# Altium PCB PCB4.PcbDoc
Units mm, origin at the board's own origin, x right, y up, seen from the top; angles counter-clockwise.
Board outline 43.43 x 53.59 mm, 2 copper layers (Top Layer, Bottom Layer); 15 components, 25 nets, 64 pads, 1 vias.
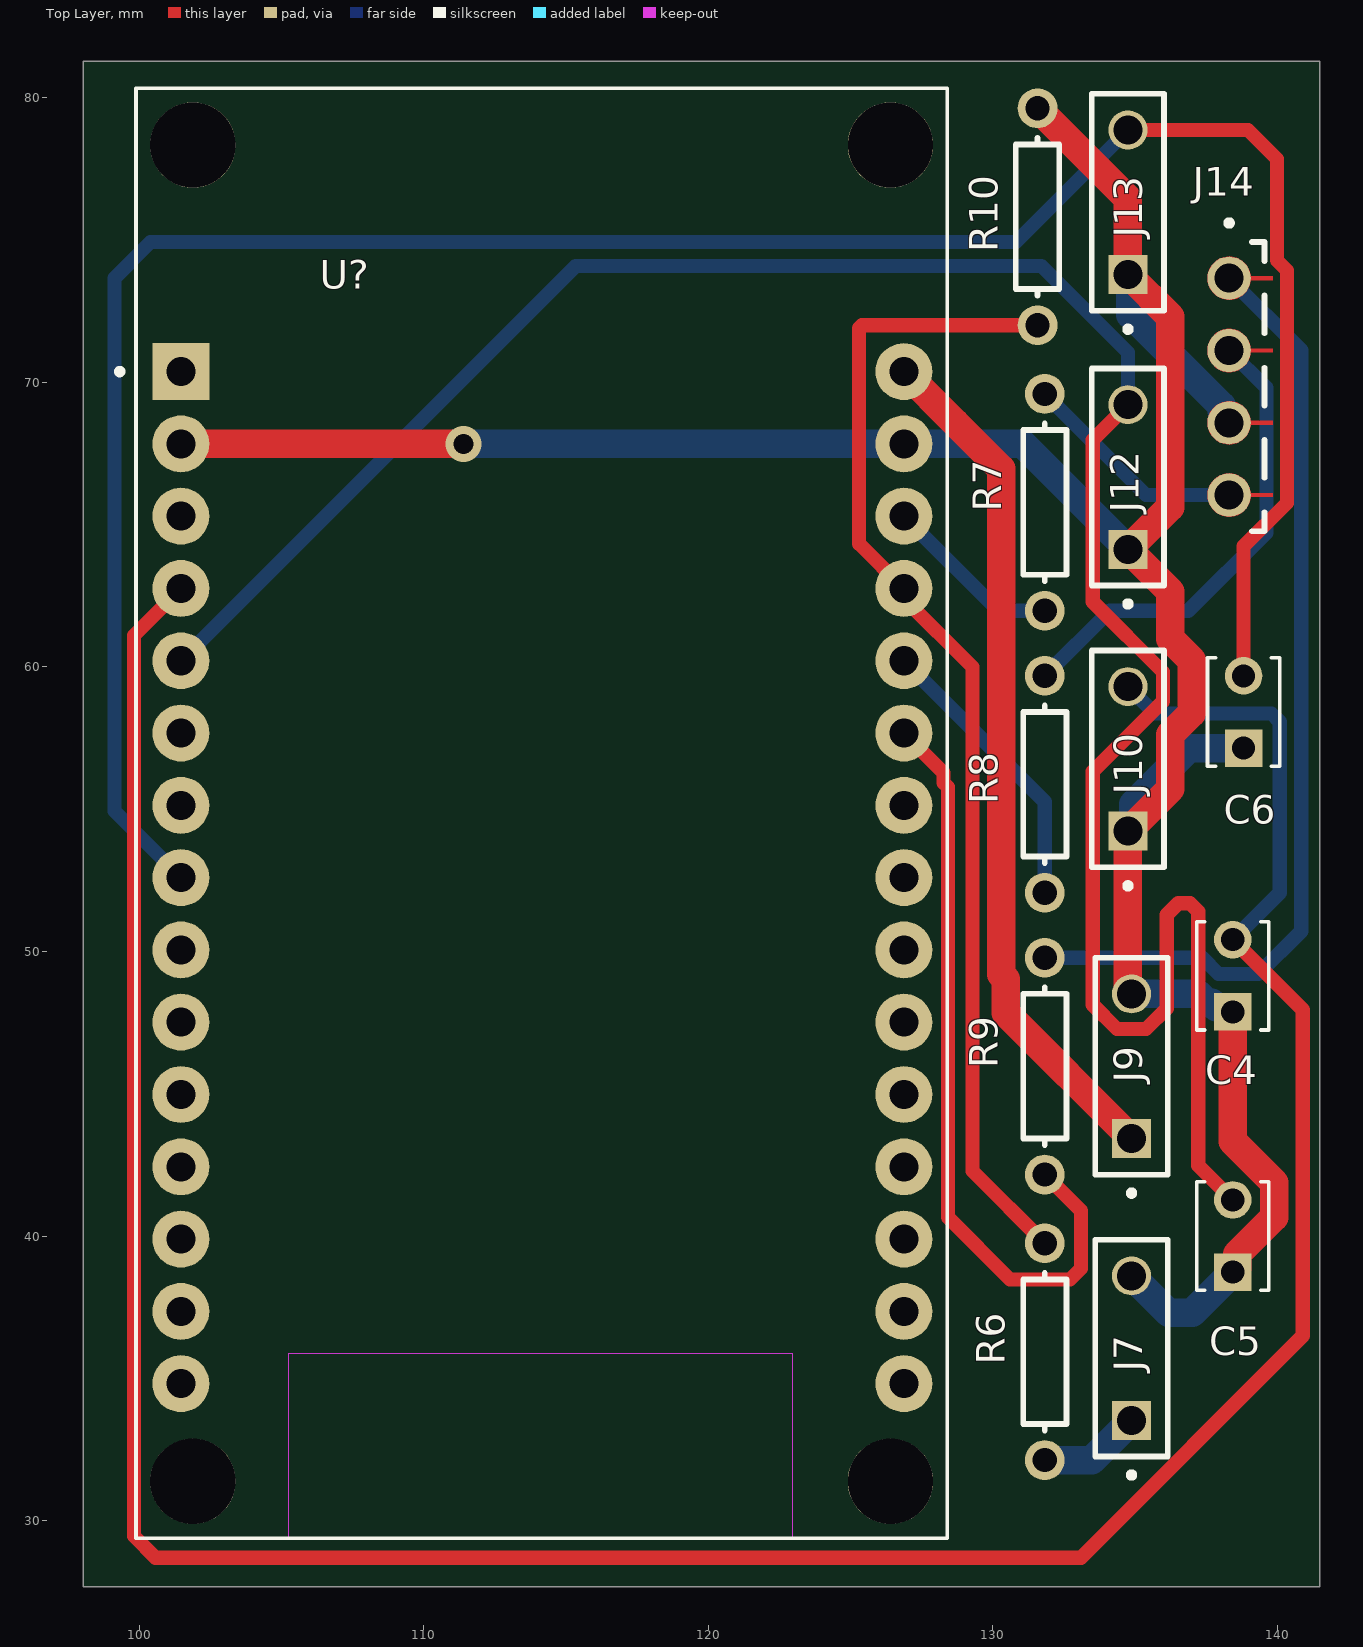
[diagram p0: Top Layer view]
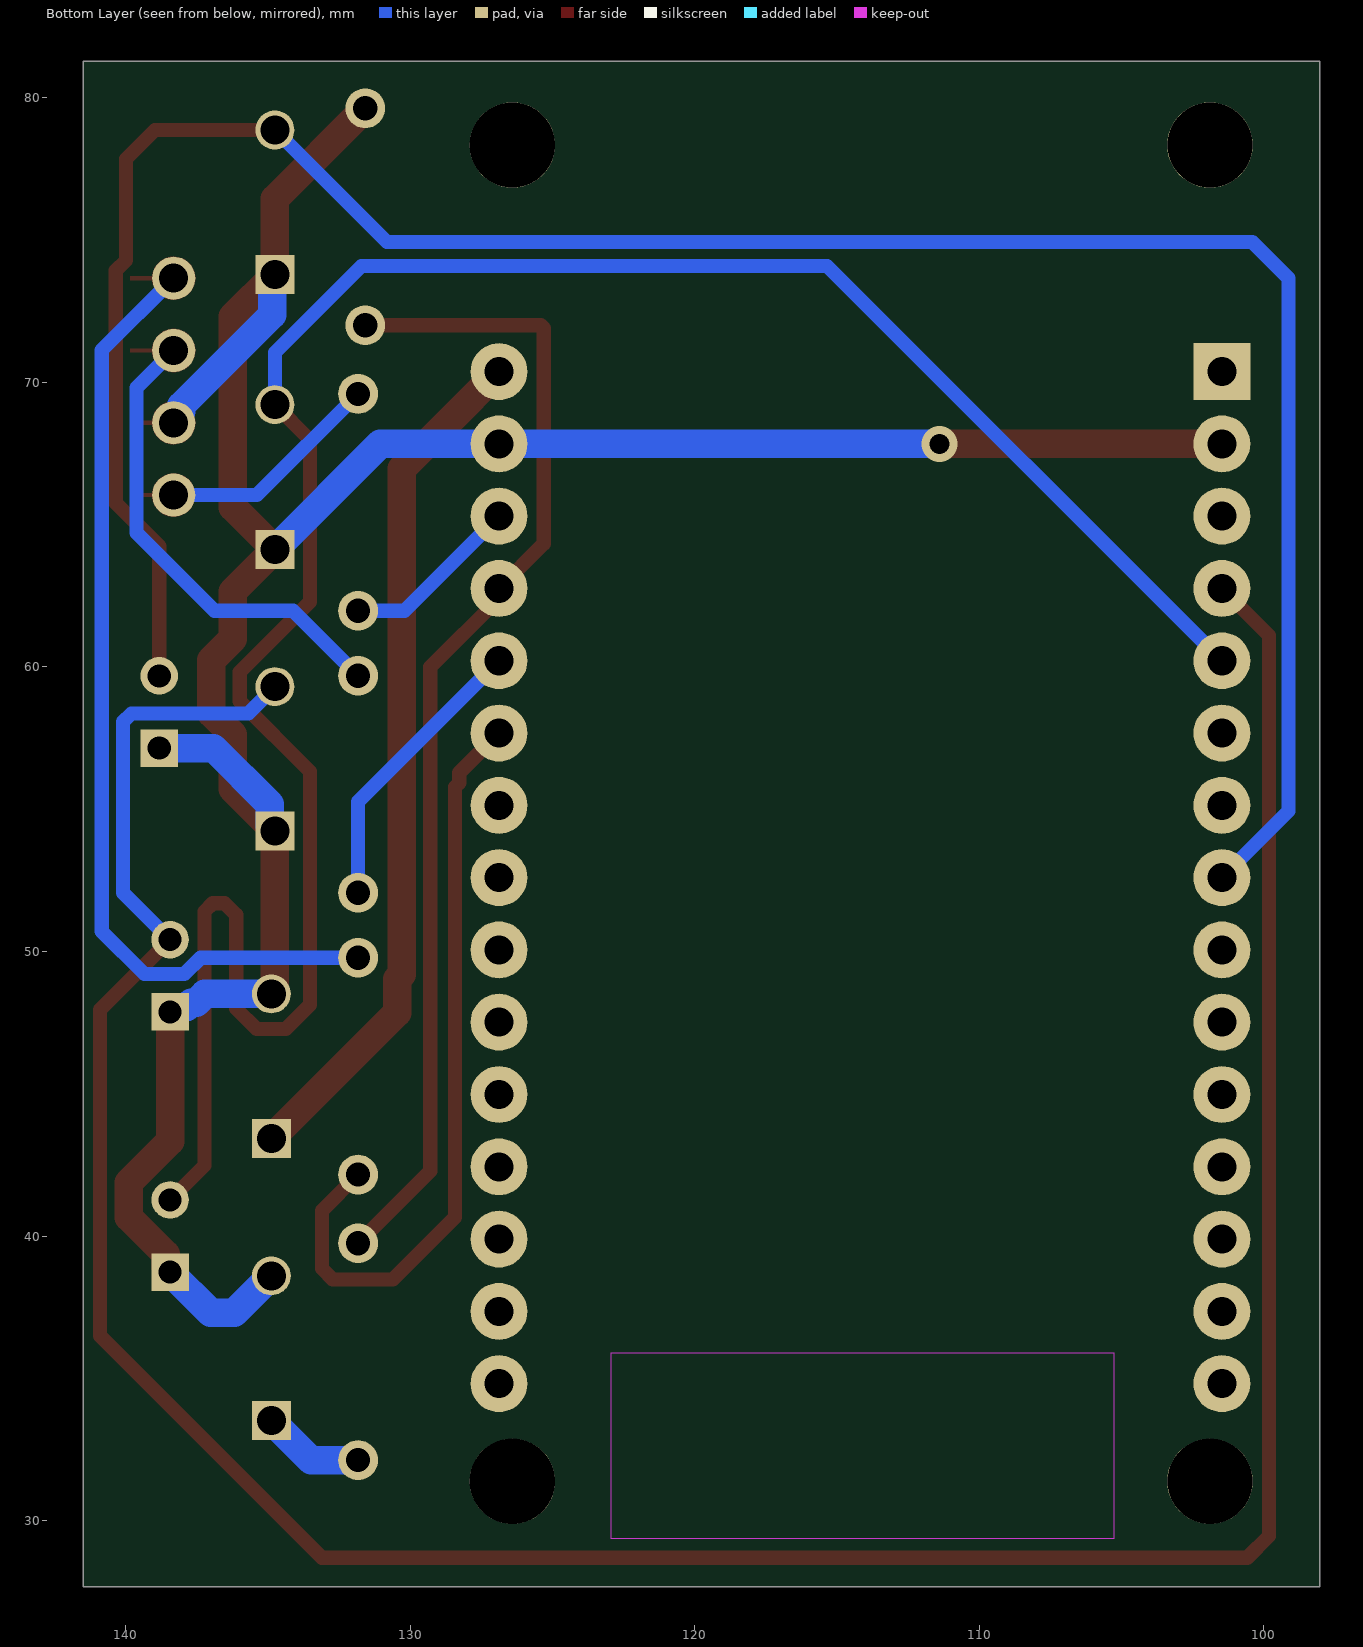
[diagram p1: Bottom Layer view, seen from below]

## Layer stack, top to bottom
Top Solder: solder mask 0.0102, Solder Resist, Dk 3.5
Top Layer: signal copper 0.0356
Dielectric 1: dielectric 0.32, FR-4, Dk 4.8
Bottom Layer: signal copper 0.0356
Bottom Solder: solder mask 0.0102, Solder Resist, Dk 3.5

## Board outline
98.044,27.686 141.478,27.686 141.478,81.28 98.044,81.28

## Design rules (kind name [scope] priority, off if disabled: settings)
Clearance [All] p1: gap=0.254 ignorepadtopadclearanceinfootprint=FALSE except(0.3: Arc-THPad Arc-Hole Track-THPad Track-Hole SMDPad-Hole THPad-Hole Via-Hole Fill-Hole Poly-Hole Region-Hole Text-Hole)
HoleToHoleClearance [All] p1: gap=0.5 allowstackedmicrovias=TRUE
PolygonConnect [All] p1: connectstyle=Relief reliefconductorwidth=0.254 reliefentries=4 polygonreliefangle="90 Angle" airgapwidth=0.254
RoutingVias [All] p1: holewidth=0.711 width=1.27 viastyle="Through Hole" minholewidth=0.711 minwidth=1.27 maxholewidth=0.711 maxwidth=1.27
SolderMaskExpansion [All] p1: expansion=0.102 istentingtop=FALSE
Width [All] p1: maxlimit=1 minlimit=0.3 preferedwidth=0.5
29 further rules are at their usual default settings.

## Components (designator, comment, footprint, x,y, rotation, side; value= is the part's Value field where it differs from the comment)
C4 "C315C470J1G5TA" CAPRR254W54L381T254H466 138.43,49.149 r90 top
C5 "C315C470J1G5TA" CAPRR254W54L381T254H466 138.43,40.005 r90 top
C6 "C315C470J1G5TA" CAPRR254W54L381T254H466 138.811,58.42 r90 top
J7 "S1" SAMTEC_TSW-202-07-T-S 134.874,33.528 r90 top
J9 "S4" SAMTEC_TSW-202-07-T-S 134.874,43.434 r90 top
J10 "S1" SAMTEC_TSW-202-07-T-S 134.747,54.229 r90 top
J12 "S2" SAMTEC_TSW-202-07-T-S 134.747,64.135 r90 top
J13 "S3" SAMTEC_TSW-202-07-T-S 134.747,73.787 r90 top
J14 "RGB" SAMTEC_MTLW-104-X-X-S-X 138.303,69.85 r90 top
R6 "Res1" AXIAL-0.3 131.826,35.941 r90 top value=30K
R7 "Res1" AXIAL-0.3 131.826,65.786 r90 top value=50
R8 "Res1" AXIAL-0.3 131.826,55.88 r90 top value=22
R9 "Res1" AXIAL-0.3 131.826,45.974 r90 top value=22
R10 "Res1" AXIAL-0.3 131.572,75.819 r90 top value=100K
U? "ESP32-DEVKIT-V1" MODULE_ESP32_DEVKIT_V1 114.173,54.864 r0 top

## Footprints (in the part's own frame and the unit in brackets; to place one, negate y for a bottom-side part, rotate by r counter-clockwise, add the part's x,y. Pads: shape width x height; smd on the part's side, far side on the other; paste and mask are expansions set on the pad)
AXIAL-0.3 [mm] "Axial Device, Thru-Hole; 2 Leads; 0.3 in Pin Spacing"
  round 1.4 hole 0.85: 1(-3.81,0) 2(3.81,0)
  silkscreen extent -2.77,-0.76 2.77,0.76
CAPRR254W54L381T254H466 [mm]
  rect 1.318x1.318 / inner round 1.318 / far side rect 1.318x1.318 hole 0.81: 1(-1.27,0)
  round 1.318 hole 0.81: 2(1.27,0)
  silkscreen extent -1.91,-1.27 1.91,1.27
MODULE_ESP32_DEVKIT_V1 [mm]
  rect 2x2 / inner round 2 / far side rect 2x2 hole 1.02: 1(-12.7,15.515)
  round 2 hole 1.02: 2(-12.7,12.975) 3(-12.7,10.435) 4(-12.7,7.895) 5(-12.7,5.355) 6(-12.7,2.815) 7(-12.7,0.275) 8(-12.7,-2.265) 9(-12.7,-4.805) 10(-12.7,-7.345) 11(-12.7,-9.885) 12(-12.7,-12.425) 13(-12.7,-14.965) 14(-12.7,-17.505) 15(-12.7,-20.045) 16(12.7,-20.045) 17(12.7,-17.505) 18(12.7,-14.965) 19(12.7,-12.425) 20(12.7,-9.885) 21(12.7,-7.345) 22(12.7,-4.805) 23(12.7,-2.265) 24(12.7,0.275) 25(12.7,2.815) 26(12.7,5.355) 27(12.7,7.895) 28(12.7,10.435) 29(12.7,12.975) 30(12.7,15.515)
  round 3 hole 3 unplated: ""(-12.28,-23.475) ""(-12.28,23.475) ""(12.23,-23.475) ""(12.23,23.475)
  Keep-Out Layer region: 8.78,-25.475 -8.91,-25.475 -8.91,-18.985 8.78,-18.985
  Keep-Out Layer region: 8.78,-25.475 -8.91,-25.475 -8.91,-18.985 8.78,-18.985
  silkscreen extent -14.95,-25.47 14.23,25.47
SAMTEC_MTLW-104-X-X-S-X [mm]
  round 1.52 hole 1.02: 01(3.81,0) 02(1.27,0) 03(-1.27,0) 04(-3.81,0)
  Top Layer region: -3.731,0.756 -3.652,0.743 -3.575,0.723 -3.501,0.694 -3.43,0.658 -3.363,0.615 -3.301,0.565 -3.245,0.509 -3.195,0.447 -3.152,0.38 -3.116,0.309 -3.087,0.235 -3.067,0.158 -3.054,0.079 -3.05,0 -3.051,-0.038 -3.054,-0.076 -3.058,-0.113 -3.065,-0.151 -3.073,-0.187 -3.083,-0.224 -3.095,-0.259 -3.109,-0.294 -3.124,-0.329 -3.141,-0.363 -3.16,-0.395 -3.18,-0.427 -3.202,-0.458 -3.225,-0.487 -3.25,-0.516 -3.276,-0.543 -3.304,-0.569 -3.333,-0.593 -3.362,-0.616 -3.393,-0.638 -3.425,-0.658 -3.458,-0.676 -3.492,-0.692 -3.527,-0.707 -3.562,-0.721 -3.598,-0.732 -3.634,-0.742 -3.671,-0.75 -3.708,-0.756 -3.745,-0.76 -3.745,-1.53 -3.875,-1.53 -3.875,-0.76 -3.912,-0.756 -3.949,-0.75 -3.986,-0.742 -4.022,-0.732 -4.058,-0.721 -4.093,-0.707 -4.128,-0.692 -4.162,-0.676 -4.195,-0.658 -4.227,-0.638 -4.258,-0.616 -4.287,-0.593 -4.316,-0.569 -4.344,-0.543 -4.37,-0.516 -4.395,-0.487 -4.418,-0.458 -4.44,-0.427 -4.46,-0.395 -4.479,-0.363 -4.496,-0.329 -4.511,-0.294 -4.525,-0.259 -4.537,-0.224 -4.547,-0.187 -4.555,-0.151 -4.562,-0.113 -4.566,-0.076 -4.569,-0.038 -4.57,0 -4.566,0.079 -4.553,0.158 -4.533,0.235 -4.504,0.309 -4.468,0.38 -4.425,0.447 -4.375,0.509 -4.319,0.565 -4.257,0.615 -4.19,0.658 -4.119,0.694 -4.045,0.723 -3.968,0.743 -3.889,0.756 -3.81,0.76
  Top Layer region: -1.191,0.756 -1.112,0.743 -1.035,0.723 -0.961,0.694 -0.89,0.658 -0.823,0.615 -0.761,0.565 -0.705,0.509 -0.655,0.447 -0.612,0.38 -0.576,0.309 -0.547,0.235 -0.527,0.158 -0.514,0.079 -0.51,0 -0.511,-0.038 -0.514,-0.076 -0.518,-0.113 -0.525,-0.151 -0.533,-0.187 -0.543,-0.224 -0.555,-0.259 -0.569,-0.294 -0.584,-0.329 -0.601,-0.363 -0.62,-0.395 -0.64,-0.427 -0.662,-0.458 -0.685,-0.487 -0.71,-0.516 -0.736,-0.543 -0.764,-0.569 -0.793,-0.593 -0.822,-0.616 -0.853,-0.638 -0.885,-0.658 -0.918,-0.676 -0.952,-0.692 -0.987,-0.707 -1.022,-0.721 -1.058,-0.732 -1.094,-0.742 -1.131,-0.75 -1.168,-0.756 -1.205,-0.76 -1.205,-1.53 -1.335,-1.53 -1.335,-0.76 -1.372,-0.756 -1.409,-0.75 -1.446,-0.742 -1.482,-0.732 -1.518,-0.721 -1.553,-0.707 -1.588,-0.692 -1.622,-0.676 -1.655,-0.658 -1.687,-0.638 -1.718,-0.616 -1.747,-0.593 -1.776,-0.569 -1.804,-0.543 -1.83,-0.516 -1.855,-0.487 -1.878,-0.458 -1.9,-0.427 -1.92,-0.395 -1.939,-0.363 -1.956,-0.329 -1.971,-0.294 -1.985,-0.259 -1.997,-0.224 -2.007,-0.187 -2.015,-0.151 -2.022,-0.113 -2.026,-0.076 -2.029,-0.038 -2.03,0 -2.026,0.079 -2.013,0.158 -1.993,0.235 -1.964,0.309 -1.928,0.38 -1.885,0.447 -1.835,0.509 -1.779,0.565 -1.717,0.615 -1.65,0.658 -1.579,0.694 -1.505,0.723 -1.428,0.743 -1.349,0.756 -1.27,0.76
  Top Layer region: 1.349,0.756 1.428,0.743 1.505,0.723 1.579,0.694 1.65,0.658 1.717,0.615 1.779,0.565 1.835,0.509 1.885,0.447 1.928,0.38 1.964,0.309 1.993,0.235 2.013,0.158 2.026,0.079 2.03,0 2.029,-0.038 2.026,-0.076 2.022,-0.113 2.015,-0.151 2.007,-0.187 1.997,-0.224 1.985,-0.259 1.971,-0.294 1.956,-0.329 1.939,-0.363 1.92,-0.395 1.9,-0.427 1.878,-0.458 1.855,-0.487 1.83,-0.516 1.804,-0.543 1.776,-0.569 1.747,-0.593 1.718,-0.616 1.687,-0.638 1.655,-0.658 1.622,-0.676 1.588,-0.692 1.553,-0.707 1.518,-0.721 1.482,-0.732 1.446,-0.742 1.409,-0.75 1.372,-0.756 1.335,-0.76 1.335,-1.53 1.205,-1.53 1.205,-0.76 1.168,-0.756 1.131,-0.75 1.094,-0.742 1.058,-0.732 1.022,-0.721 0.987,-0.707 0.952,-0.692 0.918,-0.676 0.885,-0.658 0.853,-0.638 0.822,-0.616 0.793,-0.593 0.764,-0.569 0.736,-0.543 0.71,-0.516 0.685,-0.487 0.662,-0.458 0.64,-0.427 0.62,-0.395 0.601,-0.363 0.584,-0.329 0.569,-0.294 0.555,-0.259 0.543,-0.224 0.533,-0.187 0.525,-0.151 0.518,-0.113 0.514,-0.076 0.511,-0.038 0.51,0 0.514,0.079 0.527,0.158 0.547,0.235 0.576,0.309 0.612,0.38 0.655,0.447 0.705,0.509 0.761,0.565 0.823,0.615 0.89,0.658 0.961,0.694 1.035,0.723 1.112,0.743 1.191,0.756 1.27,0.76
  Top Layer region: 3.889,0.756 3.968,0.743 4.045,0.723 4.119,0.694 4.19,0.658 4.257,0.615 4.319,0.565 4.375,0.509 4.425,0.447 4.468,0.38 4.504,0.309 4.533,0.235 4.553,0.158 4.566,0.079 4.57,0 4.569,-0.038 4.566,-0.076 4.562,-0.113 4.555,-0.151 4.547,-0.187 4.537,-0.224 4.525,-0.259 4.511,-0.294 4.496,-0.329 4.479,-0.363 4.46,-0.395 4.44,-0.427 4.418,-0.458 4.395,-0.487 4.37,-0.516 4.344,-0.543 4.316,-0.569 4.287,-0.593 4.258,-0.616 4.227,-0.638 4.195,-0.658 4.162,-0.676 4.128,-0.692 4.093,-0.707 4.058,-0.721 4.022,-0.732 3.986,-0.742 3.949,-0.75 3.912,-0.756 3.875,-0.76 3.875,-1.53 3.745,-1.53 3.745,-0.76 3.708,-0.756 3.671,-0.75 3.634,-0.742 3.598,-0.732 3.562,-0.721 3.527,-0.707 3.492,-0.692 3.458,-0.676 3.425,-0.658 3.393,-0.638 3.362,-0.616 3.333,-0.593 3.304,-0.569 3.276,-0.543 3.25,-0.516 3.225,-0.487 3.202,-0.458 3.18,-0.427 3.16,-0.395 3.141,-0.363 3.124,-0.329 3.109,-0.294 3.095,-0.259 3.083,-0.224 3.073,-0.187 3.065,-0.151 3.058,-0.113 3.054,-0.076 3.051,-0.038 3.05,0 3.054,0.079 3.067,0.158 3.087,0.235 3.116,0.309 3.152,0.38 3.195,0.447 3.245,0.509 3.301,0.565 3.363,0.615 3.43,0.658 3.501,0.694 3.575,0.723 3.652,0.743 3.731,0.756 3.81,0.76
  silkscreen extent -5.08,-1.25 5.85,0.1
SAMTEC_TSW-202-07-T-S [mm]
  rect 1.37x1.37 hole 1.02: 01(0,0)
  round 1.37 hole 1.02: 02(5.08,0)
  silkscreen extent -2.02,-1.27 6.35,1.27

## Part data
C4 C5 C6: "Capacitor: ceramic; MLCC, monolithic; 47pF; 100V; C0G; Â±5%; THT", Package="Radial Kemet", Check_prices=https://www.snapeda.com/parts/C315C470J1G5TA/KEMET/view-part/?ref=eda, MF=KEMET, MP=C315C470J1G5TA, SnapEDA_Link=https://www.snapeda.com/parts/C315C470J1G5TA/KEMET/view-part/?ref=snap
J7 J9 J10 J12 J13: library part TSW-202-07-T-S, Package=None, Availability=Unavailable, MP=TSW-202-07-T-S, Price=None
J14: library part MTLW-104-X-X-S-X, Package=None, Availability=Unavailable, MF="{'manufacturer': u'Samtec Inc.'}", MP=MTLW-104-X-X-S-X, Price=None
R6 R7 R8 R9 R10: "Resistor", LatestRevisionDate=17-Jul-2002, LatestRevisionNote="Re-released for DXP Platform.", PackageDescription="Axial Device, Thru-Hole; 2 Leads; 0.3 in Pin Spacing", PackageReference=AXIAL-0.3, Published=8-Jun-2000, Publisher="Altium Limited"
U?: "Dual core, Wi-Fi: 2.4 GHz up to 150 Mbits/s,BLE (Bluetooth Low Energy) and legacy Bluetooth, 32 bits, Up to 240 MHz", Package=None, Availability="Not in stock", Check_prices=https://www.snapeda.com/parts/ESP32-DEVKIT-V1/Do+it/view-part/?ref=eda, MF="Do it", MP=ESP32-DEVKIT-V1, Price=None, SnapEDA_Link=https://www.snapeda.com/parts/ESP32-DEVKIT-V1/Do+it/view-part/?ref=snap

## Via types
v1: diameter 1.27, hole 0.711, Top Layer to Bottom Layer, 1 vias

## Nets (pads, with @x,y where several pads share a name; then routed paths per layer and width w, separated by ;. In a path a pad name is that pad's centre, name@x,y a point inside that pad or via, vN(x,y) a via of type N, cw(c..) or ccw(c..) an arc to the next point about the centre after c; other vN are vias at no path point)
BAT+: J7.01 R6.1 | length 3.7
  Bottom Layer w0.5: J7.01@134.668,33.322 J7.01
  Bottom Layer w1: R6.1 133.477,32.131 J7.01@134.689,33.343
GND: C4.1 C5.1 C6.1 J7.02 J9.02 J10.01 J12.01 J13.01 J14.03 R10.2 U?.2 U?.29 | length 101.5
  Top Layer w0.5: J9.02@134.747,48.641 J9.02
  Top Layer w1: U?.2 v1(111.4,67.839) ; R10.2 134.747,76.454 J13.01 136.232,72.302 136.232,65.62 J12.01 136.232,62.65 136.232,60.99 136.986,60.236 136.986,58.382 136.232,57.628 136.232,55.714 J10.01 J9.02@134.747,48.641 ; C5.1 138.589,38.894 138.589,39.371 139.889,40.671 139.889,41.879 138.43,43.338 C4.1
  Bottom Layer w1: v1(111.4,67.839) U?.29 131.043,67.839 J12.01 ; J10.01 134.932,54.414 134.932,55.176 136.906,57.15 C6.1 ; J13.01 134.834,73.7 134.834,72.383 138.043,69.174 138.043,68.981 138.303,68.721 J14.03 ; J7.02 136.174,37.308 137.003,37.308 C5.1 ; J9.02@134.967,48.514 137.205,48.514 137.513,48.206 137.685,48.206 137.853,48.038 138.271,48.038 C4.1
NetC1_2: 
NetC2_2: 
NetC3_2: 
NetC4_2: C4.2 J10.02 U?.4 | length 107.7
  Top Layer w0.5: U?.4 99.822,61.108 99.822,29.464 100.584,28.702 133.096,28.702 140.893,36.499 140.893,47.956 C4.2
  Bottom Layer w0.5: J10.02 135.687,58.369 139.788,58.369 140.081,58.076 140.081,52.07 C4.2
NetC5_2: C5.2 J12.02 U?.5 | length 84.3
  Top Layer w0.5: J12.02 133.512,67.98 133.512,62.291 135.982,59.821 135.982,58.797 133.512,56.327 133.512,48.129 134.362,47.279 135.386,47.279 136.109,48.002 136.109,51.292 136.514,51.697 136.928,51.697 137.221,51.404 137.221,42.484 C5.2
  Bottom Layer w0.5: U?.5 115.346,74.092 131.705,74.092 134.747,71.05 J12.02
NetC6_2: C6.2 J13.02 U?.8 | length 84.4
  Top Layer w0.5: J13.02 138.963,78.867 139.983,77.847 139.983,74.287 140.337,73.934 140.337,65.766 138.811,64.24 C6.2
  Bottom Layer w0.5: U?.8 99.136,54.936 99.136,73.66 100.406,74.93 130.81,74.93 J13.02
NetJ6_01: 
NetJ6_02: 
NetJ6_04: 
NetJ8_01: 
NetJ8_02: 
NetJ14_01: J14.01 R9.2 | length 33.9
  Bottom Layer w0.5: R9.2 137.355,49.784 137.929,49.21 138.519,49.21 139.329,49.21 140.835,50.716 140.835,71.128 J14.01
NetJ14_02: J14.02 R8.2 | length 16.8
  Bottom Layer w0.5: R8.2 134.112,61.976 136.87,61.976 139.613,64.719 139.613,69.81 J14.02
NetJ14_04: J14.04 R7.2 | length 7.9
  Bottom Layer w0.5: R7.2 135.382,66.04 J14.04
NetR1_1: 
NetR2_1: 
NetR3_1: 
NetR4_2: 
NetR6_2: R6.2 R10.1 U?.27 | length 41.2
  Top Layer w0.5: R10.1 125.404,72.009 125.298,71.904 125.298,64.334 U?.27 126.873,62.411 129.286,59.998 129.286,42.291 R6.2
NetR7_1: R7.1 U?.28 | length 6.3
  Bottom Layer w0.5: U?.28 130.196,61.976 R7.1
NetR8_1: R8.1 U?.26 | length 10.2
  Bottom Layer w0.5: U?.26 131.826,55.266 R8.1
NetR9_1: R9.1 U?.25 | length 27.2
  Top Layer w0.5: U?.25 128.27,56.282 128.27,55.934 128.423,55.781 128.423,40.665 130.607,38.481 132.715,38.481 133.096,38.862 133.096,40.894 R9.1
VCC: J9.01 U?.30 | length 30.4
  Top Layer w0.5: 130.175,57.404 130.175,57.563
  Top Layer w1: U?.30 126.879,70.379 128.673,68.585 128.673,68.579 130.29,66.962 130.29,49.199 130.454,49.034 130.454,47.854 J9.01
pads on no net: U?. U?.1 U?.3 U?.6 U?.7 U?.9 U?.10 U?.11 U?.12 U?.13 U?.14 U?.15 U?.16 U?.17 U?.18 U?.19 U?.20 U?.21 U?.22 U?.23 U?.24